# Altium PCB PulseBeeper.PcbDoc
Units mil, origin at the board's own origin, x right, y up, seen from the top; angles counter-clockwise.
Board outline 1968.5 x 1771.65 mil, 2 copper layers (Top Layer, Bottom Layer); 40 components, 37 nets, 157 pads, 34 vias.
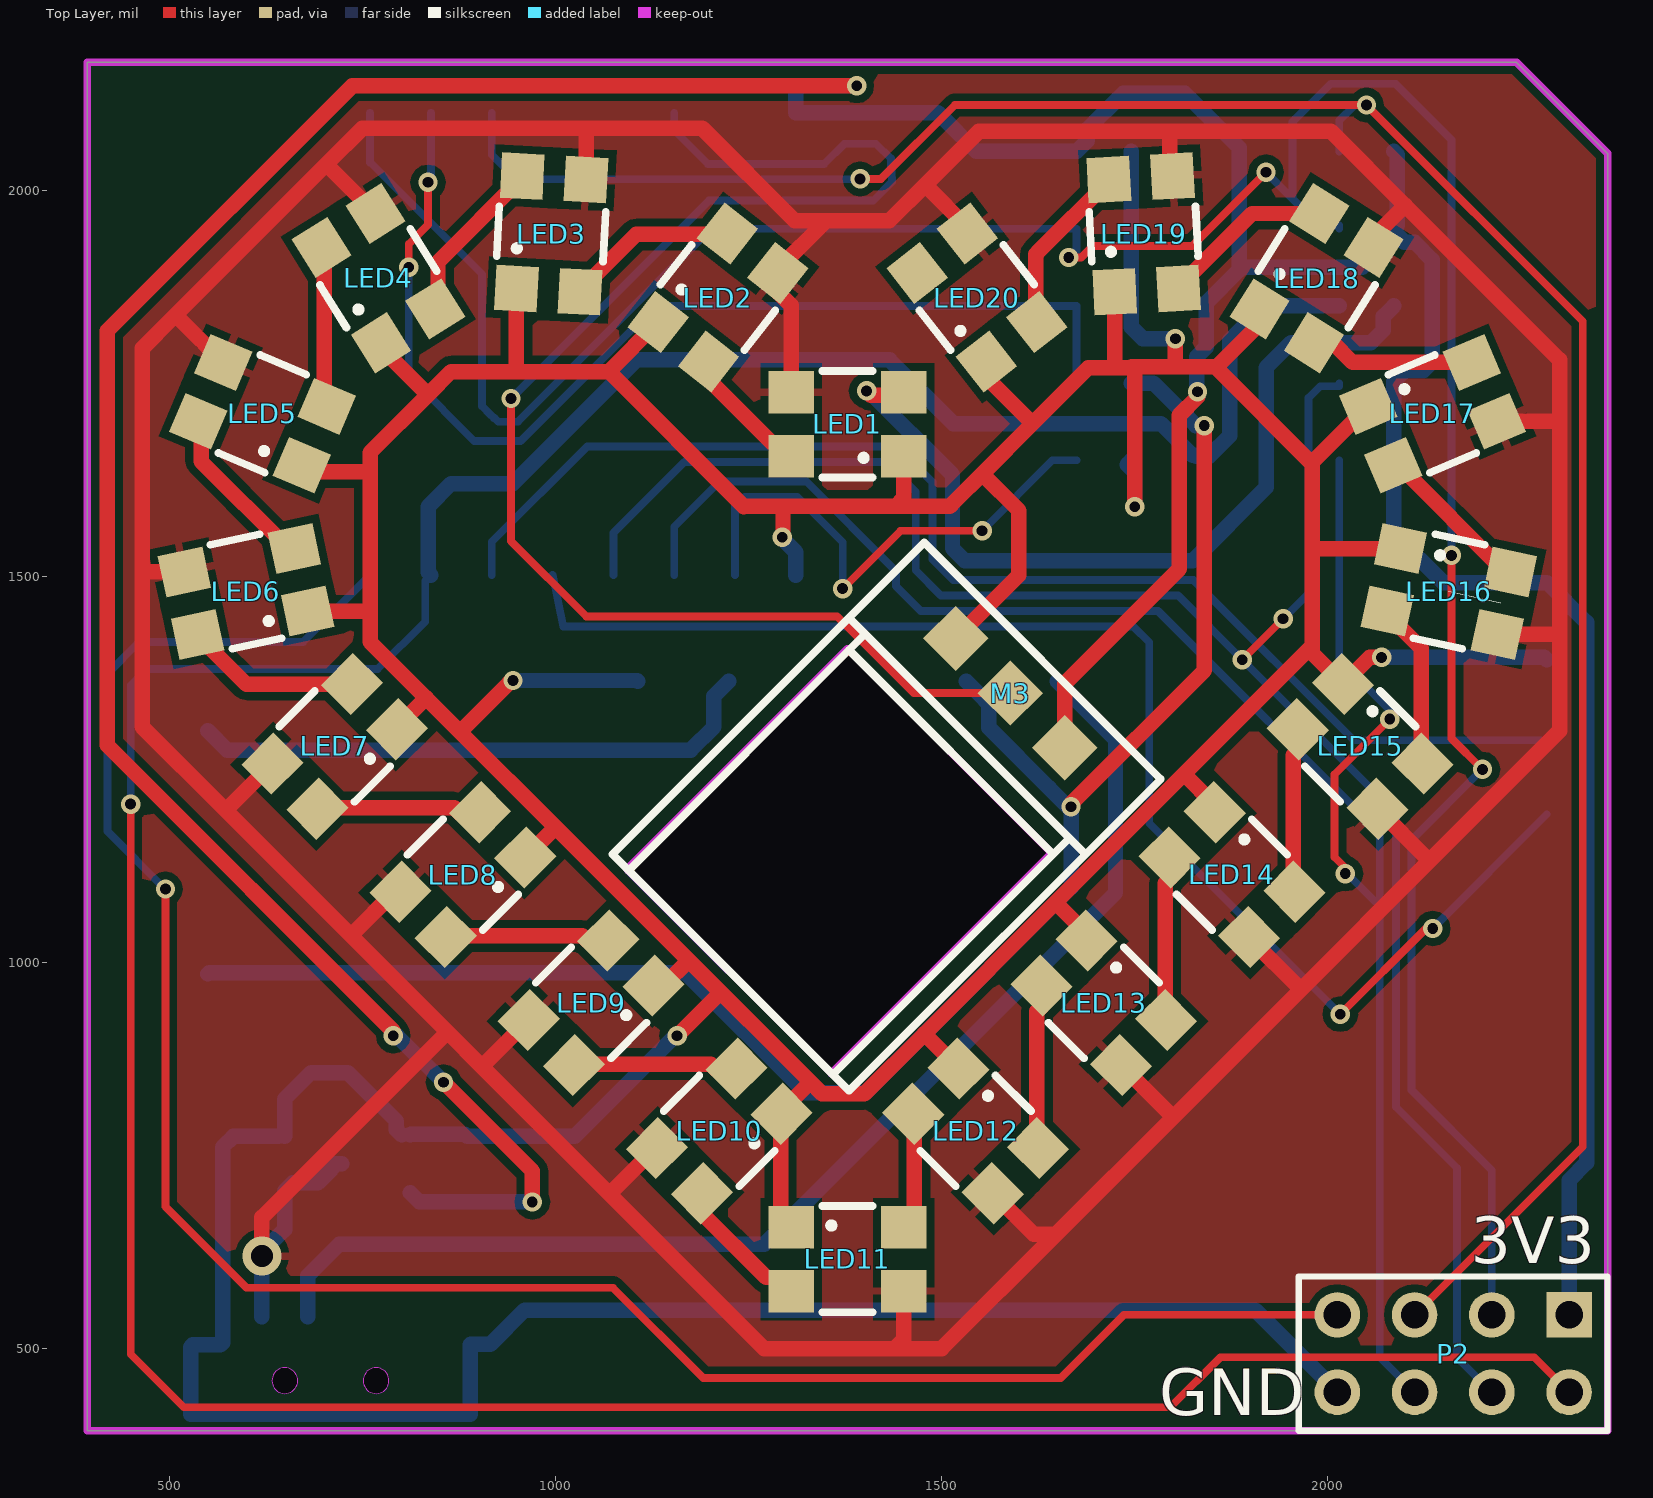
[diagram p0: Top Layer view]
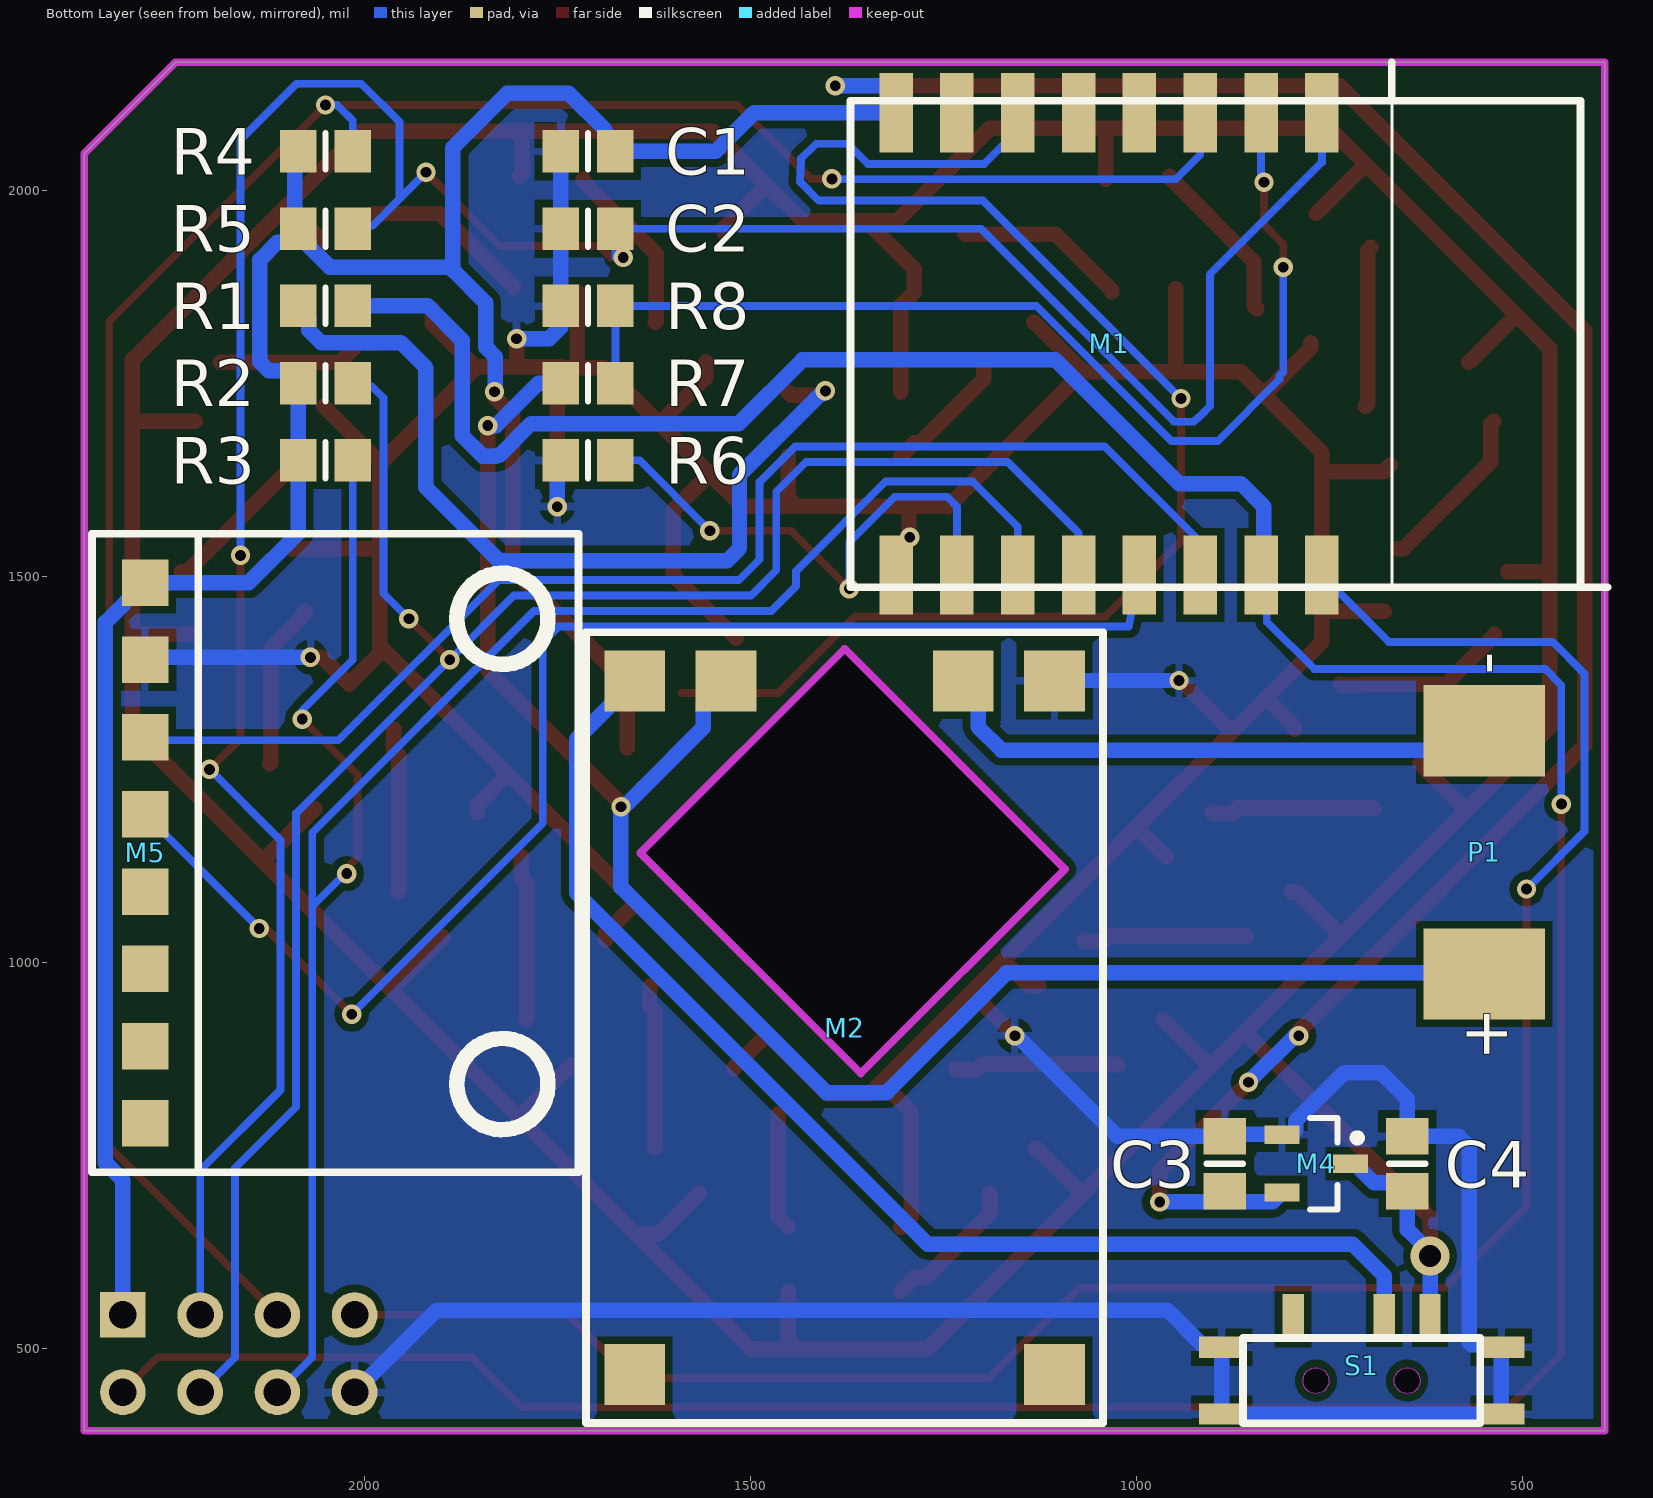
[diagram p1: Bottom Layer view, seen from below]

## Layer stack, top to bottom
Top Solder: solder mask 0.4, Solder Resist, Dk 3.5
Top Layer: signal copper 1.4
Dielectric 1: dielectric 12.6, FR-4, Dk 4.8
Bottom Layer: signal copper 1.4
Bottom Solder: solder mask 0.4, Solder Resist, Dk 3.5

## Board outline
393.7,393.7 2362.2,393.7 2362.2,2047.24 2244.09,2165.35 393.7,2165.35
cut-out: 750.98,458.66 ccw(c767.72,458.66) 767.72,441.93 ccw(c767.72,458.66) 784.45,458.66 ccw(c767.72,458.66) 767.72,475.39 ccw(c767.72,458.66)
cut-out: 632.87,458.66 ccw(c649.61,458.66) 649.61,441.93 ccw(c649.61,458.66) 666.34,458.66 ccw(c649.61,458.66) 649.61,475.39 ccw(c649.61,458.66)
cut-out: 1092.6,1120.85 1357.07,856.38 1642.42,1141.73 1377.95,1406.2

## Design rules (kind name [scope] priority, off if disabled: settings)
Clearance [All] p1: gap=10 ignorepadtopadclearanceinfootprint=FALSE except(0: Arc-Hole Track-Hole SMDPad-Hole THPad-Hole Via-Hole Fill-Hole Poly-Hole Region-Hole Text-Hole)
PolygonConnect [All] p1: connectstyle=Relief reliefconductorwidth=10 reliefentries=4 polygonreliefangle="90 Angle" airgapwidth=10
RoutingVias [All] p1: holewidth=14 width=25 viastyle="Through Hole" minholewidth=14 minwidth=25 maxholewidth=14 maxwidth=25
SolderMaskExpansion [All] p1: expansion=4 istentingtop=FALSE
Width [All] p1: maxlimit=20 minlimit=10 preferedwidth=10 minimp=50.000000 maximp=50.000000 favimp=50.000000
30 further rules are at their usual default settings.

## Components (designator, comment, footprint, x,y, rotation, side; value= is the part's Value field where it differs from the comment)
C1 "Cap" 6-0805_N 1710,2050 r180 bottom value=10uF
C2 "Cap" 6-0805_N 1710,1950 r180 bottom value=470pF
C3 "Cap" 6-0805_N 885.51,739.45 r270 bottom value=1uF
C4 "Cap" 6-0805_N 649.29,739.45 r270 bottom value=1uF
LED1 "WS2812C-2020" "WS2812 3535" 1377.95,1696.85 r0 top locked
LED2 "WS2812C-2020" "WS2812 3535" 1210.32,1860.83 r232 top locked
LED3 "WS2812C-2020" "WS2812 3535" 994.46,1943.11 r267 top locked
LED4 "WS2812C-2020" "WS2812 3535" 770.64,1885.96 r302 top locked
LED5 "WS2812C-2020" "WS2812 3535" 620.65,1710.27 r337 top locked
LED6 "WS2812C-2020" "WS2812 3535" 599.32,1480.25 r12 top locked
LED7 "WS2812C-2020" "WS2812 3535" 714.19,1279.71 r45 top locked
LED8 "WS2812C-2020" "WS2812 3535" 880.13,1113.77 r45 top locked
LED9 "WS2812C-2020" "WS2812 3535" 1046.07,947.83 r45 top locked
LED10 "WS2812C-2020" "WS2812 3535" 1212.01,781.89 r45 top locked
LED11 "WS2812C-2020" "WS2812 3535" 1377.95,615.94 r180 top locked
LED12 "WS2812C-2020" "WS2812 3535" 1543.89,781.89 r135 top locked
LED13 "WS2812C-2020" "WS2812 3535" 1709.84,947.83 r135 top locked
LED14 "WS2812C-2020" "WS2812 3535" 1875.78,1113.77 r135 top locked
LED15 "WS2812C-2020" "WS2812 3535" 2041.72,1279.71 r135 top locked
LED16 "WS2812C-2020" "WS2812 3535" 2156.59,1480.25 r168 top locked
LED17 "WS2812C-2020" "WS2812 3535" 2135.26,1710.27 r203 top locked
LED18 "WS2812C-2020" "WS2812 3535" 1985.27,1885.96 r238 top locked
LED19 "WS2812C-2020" "WS2812 3535" 1761.44,1943.11 r273 top locked
LED20 "WS2812C-2020" "WS2812 3535" 1545.59,1860.83 r308 top locked
M1 "ESP-12E&F Module" "ESP-12E&F Module" 1065.12,1800.79 r270 bottom locked
M2 "TP4056-TypeC" TP4056_17X26 1377.95,915.51 r180 bottom
M3 "TouchPad" TOUCHPAD 1380,1140 r135 top
M4 "XC6206P122MR-G" SOT23_N 767.4,739.45 r180 bottom
M5 "GY-521" GY-521 2037.4,1141.73 r180 bottom locked
P1 "Battery" BatteryPad 550,1142.52 r90 bottom locked
P2 "Header 4X2" HDR2X4 2312.2,543.7 r180 top locked
R1 "Res1" 6-0805_N 2050,1850 r0 bottom value=1K
R2 "Res1" 6-0805_N 2050,1750 r180 bottom value=10K
R3 "Res1" 6-0805_N 2050,1650 r180 bottom value=10K
R4 "Res1" 6-0805_N 2050,2050 r180 bottom value=10K
R5 "Res1" 6-0805_N 2050,1950 r180 bottom value=10K
R6 "Res1" 6-0805_N 1710,1650 r180 bottom value=10K
R7 "Res1" 6-0805_N 1710,1750 r0 bottom value=10K
R8 "Res1" 6-0805_N 1710,1850 r180 bottom value=10K
S1 "MSK12C02" MSK12C02 708.66,403.54 r180 bottom

## Footprints (in the part's own frame and the unit in brackets; to place one, negate y for a bottom-side part, rotate by r counter-clockwise, add the part's x,y. Pads: shape width x height; smd on the part's side, far side on the other; paste and mask are expansions set on the pad)
6-0805_N [mm] "Chip Resistor, Body 2.0x1.2mm, IPC Medium Density"
  rect 1.2x1.4 smd: 1(-0.9,0) 2(0.9,0)
  silkscreen extent 0,-0.6 0,0.6, body extent -1.07,-0.7 1.07,0.7, height 0.7
BatteryPad [mm]
  rect 3x4 smd: 1(-4,0) 2(4,0)
"ESP-12E&F Module" [mm]
  rect 2.6x1.1 smd: 1(-7.6,7.75) 2(-7.6,5.75) 3(-7.6,3.75) 4(-7.6,1.75) 5(-7.6,-0.25) 6(-7.6,-2.25) 7(-7.6,-4.25) 8(-7.6,-6.25) 15(7.6,-6.25) 16(7.6,-4.25) 17(7.6,-2.25) 18(7.6,-0.25) 19(7.6,1.75) 20(7.6,3.75) 21(7.6,5.75) 22(7.6,7.75)
  silkscreen extent -8,-7.75 8,16.25
GY-521 [mil]
  rect 60x60 smd mask+4: 1(-246.06,350) 2(-246.06,250) 3(-246.06,150) 4(-246.06,50) 5(-246.06,-50) 6(-246.06,-150) 7(-246.06,-250) 8(-246.06,-350)
  silkscreen extent -315,-413 315,413
HDR2X4 [mm] "Connector; Header; 4x2 Position"
  rect 1.5x1.5 hole 0.9: 1(0,0)
  round 1.5 hole 0.9: 2(0,2.54) 3(2.54,0) 4(2.54,2.54) 5(5.08,0) 6(5.08,2.54) 7(7.62,0) 8(7.62,2.54)
  silkscreen extent -1.27,-1.27 8.89,3.81
MSK12C02 [mm]
  rect 0.7x1.5 smd: 1(-2.25,3.5) 2(0.75,3.5) 3(2.25,3.5)
  rect 1.5x0.7 smd: 4(-4.6,0.3) 4(-4.6,2.5) 4(4.6,0.3) 4(4.6,2.5)
  silkscreen extent -3.9,0 3.9,2.8
SOT23_N [mm] "SOT23, 3-Leads, Body 2.9x1.3mm, Pitch 0.95mm, Lead Span 2.3mm - Reverse Pinning, IPC Medium Density"
  rect 1.15x0.6 smd: 1(1.125,0) 2(-1.125,-0.95) 3(-1.125,0.95)
  silkscreen extent -0.2,-1.5 1.47,1.5, body extent -0.7,-1.5 0.7,1.5, height 1.1
TOUCHPAD [mil]
  rect 60x60 smd mask+4: 1(100,-295.28) 2(0,-295.28) 3(-100,-295.28)
  silkscreen extent -217,-354 217,217
TP4056_17X26 [mm]
  rect 2x2 smd mask+0.102: 1(-3.9,11.4) 2(3.9,11.4) 3(-6.9,11.4) 4(6.9,11.4) ""(-6.9,-11.4) ""(6.9,-11.4)
  silkscreen extent -8.5,-13 8.5,13
"WS2812 3535" [mm]
  rect 1.5x1.4 smd: 1(-1.85,-1.05) 2(1.85,-1.05) 3(1.85,1.05) 4(-1.85,1.05)
  silkscreen extent -0.83,-1.75 0.83,1.75

## Part data
C1 C2 C3 C4: "Capacitor", LatestRevisionDate=17-Jul-2002, LatestRevisionNote="Re-released for DXP Platform.", PackageDescription="Radial Cap, Thru-Hole; 2 Leads; 0.3 in Pin Spacing", PackageReference=RAD-0.3, Published=8-Jun-2000, Publisher="Altium Limited"
LED1 LED2 LED3 LED4 LED5 LED6 LED7 LED8 LED9 LED10 LED11 LED12 LED13 LED14 LED15 LED16 LED17 LED18 LED19 LED20: "LED", Manufacturer_Name=Worldsemi, Datasheet Link=http://www.world-semi.com/DownLoadFile/139, Height=0.84mm, Manufacturer_Part_Number=WS2812C-2020
M4: "Integrated Circuit", Manufacturer_Name=Torex, Mouser Part Number=865-XC6206P122MR-G, Datasheet Link=https://www.torexsemi.com/file/xc6206/XC6206.pdf, Height=1.3mm, Manufacturer_Part_Number=XC6206P122MR-G, Mouser Price/Stock=https://www.mouser.co.uk/ProductDetail/Torex-Semiconductor/XC6206P122MR-G?qs=AsjdqWjXhJ%2F35%2FU%2FZk2JYg%3D%3D
P1: library part "Header 2", "Header, 2-Pin", LatestRevisionDate=17-Jul-2002, LatestRevisionNote="Re-released for DXP Platform.", Publisher="Altium Limited"
P2: "Header, 4-Pin, Dual row", LatestRevisionDate=17-Jul-2002, LatestRevisionNote="Re-released for DXP Platform.", Publisher="Altium Limited"
R1 R2 R3 R4 R5 R6 R7 R8: "Resistor", LatestRevisionDate=17-Jul-2002, LatestRevisionNote="Re-released for DXP Platform.", PackageDescription="Axial Device, Thru-Hole; 2 Leads; 0.3 in Pin Spacing", PackageReference=AXIAL-0.3, Published=8-Jun-2000, Publisher="Altium Limited"

## Via types
v1: diameter 25, hole 14, Top Layer to Bottom Layer, tented both sides, 33 vias
v2: diameter 50, hole 28, Top Layer to Bottom Layer, tented both sides, 1 vias

## Nets (pads, with @x,y where several pads share a name; then routed paths per layer and width w, separated by ;. In a path a pad name is that pad's centre, name@x,y a point inside that pad or via, vN(x,y) a via of type N, cw(c..) or ccw(c..) an arc to the next point about the centre after c; other vN are vias at no path point)
3V3: C1.2 C3.2 M1.8 M3.3 M4.2 M5.1 P2.1 R2.1 R3.1 R4.1 R5.1 | length 6254.4
  Top Layer w20: v1(790,905) 790,910.96 420,1280.96 420,1818 737,2135 v1(1390,2135) ; v1(855,845) 970,730 v1(970,690) ; M3.3 1659.5,1361.5 1807.5,1509.5 1807.5,1708.46 1831.21,1732.17 v1(1831.21,1738.75)
  Bottom Layer w20: v1(790,905) 795,905 v1(855,845) ; M4.2 823.74,690 v1(970,690) ; v1(1390,2135) 1318.18,2135 1311.18,2128 M1.8 1495,2100 1545,2050 C1.2 1688.19,2063.62 1688.19,2078.19 1735,2125 1815,2125 1885,2055 1885,1896.33 1842.5,1853.83 1842.5,1796.54 1830,1784.04 1830,1739.96 v1(1831.21,1738.75) ; 1885,1900 2044.39,1900 2071.81,1927.42 2071.81,1936.38 2090,1954.57 2090,2045.43 R4.1 ; R5.1@2085.43,1946.07 2099.05,1932.44 2112.13,1932.44 2135,1909.57 2135,1777.47 2123.28,1765.76 2099.06,1765.76 2085.43,1752.14 R3.1 2085.43,1555.6 2149.31,1491.73 M5.1 2335,1440.2 2335,740.8 2312.2,718 P2.1
5V: C4.2 LED1.4 LED2.4 LED3.4 LED4.4 LED5.4 LED6.4 LED7.4 LED8.4 LED9.4 LED10.4 LED11.4 LED12.4 LED13.4 LED14.4 LED15.4 LED16.4 LED17.4 LED18.4 LED19.4 LED20.4 M4.1 S1.3 | length 8054.6
  Top Layer w20: LED6.4 465,1505.54 ; LED5.4 511.53,1835 505,1835 ; v2(620,619.92) 620,670 860,910 ; LED7.4 576.01,1200 570,1200 ; LED4.4 705,2031.73 705,2035 ; LED8.4 791.5,1091.5 735,1035 ; LED9.4 905,865.22 905,865 ; LED3.4 1039.56,2079.56 1040,2080 ; LED10.4 1129.62,759.62 1070,700 ; LED1.4 1305.12,1850.83 1287.74,1868.21 LED2.4 1287.74,1897.74 1350,1960 ; LED11.4 1450.79,511.72 1439.07,500 ; LED20.4 1533.32,1951.68 1480,2005 1480,2008 ; LED12.4 1619.04,648.28 1648.28,648.28 ; LED13.4 1799.2,800 1800,800 ; LED19.4 1795,2021.92 1795,2075 1796.09,2076.09 ; LED14.4 1898.05,1031.95 1965,965 ; LED18.4 2058.92,1938.92 2100,1980 ; LED15.4 2130.47,1132.5 2132.5,1132.5 ; LED17.4 2299.33,1700.67 2300,1700 ; LED16.4 2295.33,1424.67 2300,1420 ; 465,1505.54 465,1795 505,1835 ; 465,1505.54 465,1305 570,1200 ; 505,1835 705,2035 ; 570,1200 735,1035 ; 705,2035 750,2080 1040,2080 ; 735,1035 860,910 ; 860,910 905,865 ; 905,865 1070,700 ; 1040,2080 1190,2080 1310,1960 1350,1960 ; 1070,700 1270,500 1439.07,500 ; 1350,1960 1432,1960 1480,2008 ; 1439.07,500 1500,500 1648.28,648.28 ; 1480,2008 1548.09,2076.09 1796.09,2076.09 ; 1648.28,648.28 1800,800 ; 1796.09,2076.09 2003.91,2076.09 2100,1980 ; 1800,800 1965,965 ; 1965,965 2132.5,1132.5 ; 2100,1980 2300,1780 2300,1700 ; 2132.5,1132.5 2300,1300 2300,1420 ; 2300,1420 2300,1700
  Bottom Layer w20: S1.3 620,541.42 v2(620,619.92) 620,624.84 649.29,654.14 C4.2 659.83,714.55 692.36,714.55 710.47,732.66 710.47,737.64 712.28,739.45 M4.1
ADC: M1.2 R7.1 R8.2 | length 1424.2
  Top Layer w10: v1(810,1900) 810,1930 835,1955 v1(835,2010)
  Bottom Layer w10: v1(810,1900) 810,1764.38 815,1759.38 815,1755 895,1675 954.64,1675 1129.64,1850 R8.2 1674.57,1799 R7.1 ; v1(835,2010) 835,2014.06 838.74,2017.8 M1.2
B+: M2.1 P1.1 R7.2 | length 2317.2
  Top Layer w20: v1(1667.42,1201.53) 1667.42,1205.48 1840,1378.06 v1(1840,1695)
  Bottom Layer w20: P1.1 551.51,986.55 1168.45,986.55 1323.62,831.38 1401.38,831.38 1667.42,1097.42 1667.42,1197.58 1639,1226 1560.87,1304.13 1560.87,1334.96 1549.18,1346.64 M2.1@1540,1355.83 ; v1@1661.21,1203.79 1665.16,1203.79 v1(1667.42,1201.53) ; R7.2 1774,1750 1829,1695 v1(1840,1695) ; M2.1@1540,1355.83 M2.1 M2.1@1540,1355.83
EN: M1.3 P2.5 R4.2 | length 3096.2
  Top Layer w10: v1(1394.41,2014.41) 1421.41,2014.41 1517,2110 v1(2050,2110) 2330,1830 2330,761.5 P2.5
  Bottom Layer w10: M1.3 917.48,2045.52 949.18,2013.82 1393.82,2013.82 v1(1394.41,2014.41) ; R4.2 2014.57,2090 2034.57,2110 v1(2050,2110)
GND: C1.1 C2.1 C3.1 C4.1 LED1.2 LED2.2 LED3.2 LED4.2 LED5.2 LED6.2 LED7.2 LED8.2 LED9.2 LED10.2 LED11.2 LED12.2 LED13.2 LED14.2 LED15.2 LED16.2 LED17.2 LED18.2 LED19.2 LED20.2 M1.15 M2.4 M3.1 M4.3 M5.2 P2.8 R6.1 R8.1 S1.4 | length 9653.5
  Top Layer w20: LED5.2 680.3,1635 760,1635 ; LED6.2 759.96,1454.96 760,1455 ; LED4.2 774.18,1795.82 835,1735 ; LED7.2 794.92,1304.92 832.5,1342.5 ; v1(945,1365) 943.65,1365 941.15,1362.5 940.41,1362.5 876.45,1298.55 ; LED3.2 949.37,1765.63 950,1765 ; LED8.2 999.82,1175 1000,1175 ; LED9.2 1140.1,970.1 1172.5,1002.5 ; LED2.2 1069.01,1765 ; v1(1157.5,905) 1212.5,960 1215,960 ; LED10.2 LED10.2@1292.74,807.74 ; v1(1293.59,1550.45) 1294.55,1551.41 1294.55,1590.33 1295,1590.79 ; LED11.2 1291.35,671.05 1291.35,806.35 LED10.2@1292.74,807.74 ; LED1.2 1450.79,1600.93 1440.25,1590.39 ; 1509.47,1591.32 1510.39,1590.39 ; M3.1 1600,1501.42 1600,1585 1552.5,1632.5 ; LED12.2 1521.62,863.38 1477.5,907.5 ; LED20.2 1557.85,1757.15 1617.5,1697.5 ; LED13.2 1687.57,1037.43 1647.5,1077.5 ; LED19.2 1723.97,1770 ; v1(1750,1590) 1750,1765 1745,1770 ; v1(1802.5,1807.5) 1802.5,1771.25 ; LED14.2 1853.51,1203.99 1813.75,1243.75 ; LED18.2 1911.62,1826.62 1855,1770 ; LED17.2 1980,1647.8 1980,1645 ; v1(2069.5,1395) 2054.01,1395 2019.45,1360.44 1980,1399.89 1980,1410 ; LED16.2 1980.83,1535.83 1980,1535 ; 760,1455 760,1415 832.5,1342.5 ; 760,1455 760,1635 ; 760,1635 760,1660 835,1735 ; 832.5,1342.5 876.45,1298.55 ; 835,1735 865,1765 950,1765 ; 876.45,1298.55 1000,1175 ; 950,1765 1069.01,1765 ; 1000,1175 1172.5,1002.5 ; 1069.01,1765 1244.01,1590 1244.41,1590.39 1244.8,1590.79 1439.86,1590.79 1440.25,1590.39 ; 1172.5,1002.5 1330,845 ; LED10.2@1292.74,807.74 1330,845 ; 1330,845 1345,830 1400,830 1477.5,907.5 ; 1440.25,1590.39 1510.39,1590.39 ; 1477.5,907.5 1647.5,1077.5 ; 1510.39,1590.39 1518.08,1598.08 1552.5,1632.5 ; 1552.5,1632.5 1617.5,1697.5 ; 1617.5,1697.5 1690,1770 1723.97,1770 ; 1647.5,1077.5 1813.75,1243.75 ; 1723.97,1770 1745,1770 ; 1745,1770 1746.25,1771.25 1802.5,1771.25 ; 1802.5,1771.25 1853.75,1771.25 1855,1770 ; 1813.75,1243.75 1974.95,1404.95 1980,1410 ; 1855,1770 1980,1645 ; 1980,1410 1980,1535 ; 1980,1535 1980,1645
  Bottom Layer w20: C4.1@640.88,774.88 583,774.88 569,760.88 569,507.83 566.23,505.06 530.65,505.06 527.56,501.97 527.56,415.35 889.76,415.35 S1.4@889.76,501.97 ; C4.1 649.29,823.18 683.61,857.5 731.04,857.5 794.05,794.49 794.05,783.66 M4.3@800.87,776.85 ; M4.3 812.6,777.76 882.64,777.76 C3.1 1024.88,774.88 1155,905 v1(1157.5,905) ; S1.4@889.76,505 890.51,505.75 915.75,505.75 960,550 1905.9,550 P2.8 ; v1(945,1365) 1105.63,1365 M2.4 ; v1(1293.59,1550.45) 1293.59,1548.69 1311.18,1531.1 M1.15 ; R6.1 1740,1644.57 1750,1634.57 v1(1750,1590) ; C1.1 C2.1 R8.1 1745.43,1822.43 1760.36,1807.5 v1(1802.5,1807.5) ; v1(2069.5,1395) 2280.2,1395 M5.2
IO0: M1.18 P2.4 R2.2 | length 2578.8
  Top Layer w10: v1(1889,1392) v1(1942,1445)
  Bottom Layer w10: M1.18 1074.96,1556 1166.96,1648 1427.8,1648 1466.25,1609.55 1466.25,1507.75 1499,1475 1806,1475 v1(1889,1392) 2088,1193.04 2088,813 2167,734 2167,488.9 P2.4 ; v1(1942,1445) 1975,1478 1975,1731 1990,1746 2014.57,1746 R2.2
IO2: M1.17 P2.6 R3.2 | length 2602.1
  Top Layer w10: v1(2022.5,1115) 2022.5,1122.5 2008.63,1136.37 2008.63,1243.63 v1(2080,1315)
  Bottom Layer w10: M1.17 1153.7,1564.01 1212.44,1622.75 1324.54,1622.75 1440.77,1506.53 1440.77,1487.23 1473,1455 1780,1455 2067,1168 2067,1073 ; R3.2 2014.57,1391.97 2080,1326.54 v1(2080,1315) ; v1(2022.5,1115) 2025,1115 2067,1073 ; P2.6 2067,488.9 2067,1073
IO4: M1.19 M5.4 | length 1793.6
  Top Layer w10: v1(2016,933) 2126.94,1043.94 v1(2135.67,1043.94)
  Bottom Layer w10: M1.19 1010,1435 1748,1435 1768.57,1414.43 1768.57,1180.43 v1(2016,933) ; v1(2135.67,1043.94) M5.4
IO5: M1.20 M5.3 | length 1678
  Bottom Layer w10: M1.20 917.48,1544.48 1041,1668 1442,1668 1488,1622 1488,1522 1515,1495 1826.04,1495 2033.54,1287.5 2279.23,1287.5 M5.3
IO12: M1.6 M3.2 | length 1891.9
  Top Layer w10: v1(942.47,1730) 942.47,1545.53 1040,1448 1364.44,1448 1463.65,1348.79 M3.2
  Bottom Layer w10: v1(942.47,1730) 1198.79,1986.32 1411.32,1986.32 1435.65,2010.65 1434.45,2037.14 1434.27,2041.14 1414.54,2060 1374.18,2060 1348,2033.82 1197.18,2033.82 1153.7,2077.3 M1.6
IO15: M1.16 R6.2 | length 688.9
  Top Layer w10: v1(1371.75,1484) 1446.75,1559 v1(1552.3,1559)
  Bottom Layer w10: M1.16 1232.44,1590 1245.2,1602.75 1313,1602.75 1371.75,1544 v1(1371.75,1484) ; v1(1552.3,1559) 1643.3,1650 R6.2
NetLED1_1: LED1.1 LED2.3 | length 191.5
  Top Layer w20: LED2.3@1198.05,1759.88 LED2.3 1198.05,1754.7 1279.68,1673.07 1287.56,1673.07 LED1.1 LED1.1@1303.15,1655.51
NetLED1_3: LED1.3 R1.2 | length 1119.3
  Top Layer w20: v1(1402.77,1740) 1408.31,1734.46 1447.05,1734.46 LED1.3
  Bottom Layer w20: v1(1402.77,1740) 1405.36,1740 1514,1631.36 1514,1536 1530,1520 1825,1520 1920,1615 1920,1770 1952.44,1802.44 2055.53,1802.44 2071.81,1818.72 2071.81,1836.38 R1.2
NetLED2_1: LED2.1 LED3.3 | length 223
  Top Layer w20: LED3.3 1031.93,1870.07 1104.33,1942.47 1221.37,1942.47 LED2.1
NetLED3_1: LED3.1 LED4.3 | length 218.6
  Top Layer w20: LED4.3 847.87,1849.68 847.87,1907.03 956.99,2016.15 LED3.1
NetLED4_1: LED4.1 LED5.3 | length 208.8
  Top Layer w20: LED4.1 700.55,1922.25 700.55,1723.15 LED5.3
NetLED5_1: LED5.1 LED6.3 | length 221
  Top Layer w20: LED5.1 541.26,1696.86 541.26,1648.74 654.17,1535.83 LED6.3
NetLED6_1: LED6.1 LED7.3 | length 228.3
  Top Layer w20: LED6.1 536.67,1423.33 600,1360 709.28,1360 710.23,1359.05 735.06,1359.05 LED7.3
NetLED7_1: LED7.1 LED8.3 | length 214.6
  Top Layer w20: LED7.1 693.31,1200.37 868.91,1200.37 876.17,1193.11 901.01,1193.11 LED8.3
NetLED8_1: LED8.1 LED9.3 | length 214.6
  Top Layer w20: LED8.1 859.25,1034.43 1034.85,1034.43 1042.12,1027.17 1066.95,1027.17 LED9.3
NetLED9_1: LED9.1 LED10.3 | length 214.6
  Top Layer w20: LED9.1 1025.19,868.49 1200.8,868.49 1208.06,861.23 1232.89,861.23 LED10.3
NetLED10_1: LED10.1 LED11.3 | length 183.4
  Top Layer w20: LED10.1 1189.21,700.62 1189.21,675.79 1272.84,592.17 1287.56,592.17 LED11.3
NetLED11_1: LED11.1 LED12.3 | length 153.2
  Top Layer w20: LED11.1 1464.55,671.05 1464.55,802.77 LED12.3
NetLED12_1: LED12.1 LED13.3 | length 214.6
  Top Layer w20: LED12.1 1623.24,761.01 1623.24,936.62 1630.5,943.88 1630.5,968.71 LED13.3
NetLED13_1: LED13.1 LED14.3 | length 214.6
  Top Layer w20: LED13.1 1789.18,926.95 1789.18,1102.56 1796.44,1109.82 1796.44,1134.65 LED14.3
NetLED14_1: LED14.1 LED15.3 | length 214.6
  Top Layer w20: LED14.1 1955.12,1092.89 1955.12,1268.5 1962.38,1275.76 1962.38,1300.59 LED15.3
NetLED15_1: LED15.1 LED16.3 | length 216.4
  Top Layer w20: LED16.3 2076.75,1450.87 2121.06,1406.56 2121.06,1258.83 LED15.1
NetLED16_1: LED16.1 LED17.3 | length 209.3
  Top Layer w20: LED17.3 2091.09,1643.76 2229.31,1505.54 LED16.1
NetLED17_1: LED17.1 LED18.3 | length 215
  Top Layer w20: LED18.3 2006.54,1802.29 2032.05,1776.78 LED17.1
NetLED18_1: LED18.1 LED19.3 | length 223.6
  Top Layer w20: LED19.3 1806.54,1874.4 1901.77,1969.63 LED18.1
NetLED19_1: LED19.1 LED20.3 | length 224.5
  Top Layer w20: LED20.3 1621.79,1830.1 1621.79,1916.79 1625,1920 1625,1920.47 1716.35,2011.82 LED19.1
NetM2_2: M2.2 P1.2 | length 745.2
  Bottom Layer w20: P1.2 575,1275 1175,1275 1205,1305 1205,1344.92 M2.2
NetM2_3: M2.3 S1.2 | length 1609.6
  Bottom Layer w20: S1.2 679.13,594.13 720,635 1270,635 1725,1090 1725,1288.94 1678.98,1334.96 M2.3
RST: C2.2 M1.1 P2.3 R5.2 | length 3772
  Top Layer w10: v1(1664.48,1912.6) 1680.6,1912.6 1695.54,1927.54 1824.32,1927.54 v1(1919.89,2023.11) ; v1(2160,1527) 2160,1290 v1(2200,1250)
  Bottom Layer w10: M1.1 760,2035.75 905,1890.75 905,1720 915,1710 920,1705 920.94,1705 925.94,1700 951.36,1700 1201.36,1950 C2.2 1674.57,1912.6 v1(1664.48,1912.6) ; v1(1919.89,2023.11) 1954,1989 ; R5.2 2014.57,1954 1989,1954 1954,1989 ; v1(2160,1527) 2160,2065 2087.5,2137.5 2003.5,2137.5 1954,2088 1954,1989 ; v1(2200,1250) 2108.17,1158.17 2108.17,834.83 2212.2,730.8 P2.3
RX: M1.21 P2.2 R1.1 | length 4834.1
  Top Layer w10: v1(450,1205) 450,493 519,424 1796,424 1861,489 2266.9,489 P2.2
  Bottom Layer w10: v1(450,1205) 450,1359.01 470.99,1380 770,1380 831.25,1441.25 831.25,1494.08 M1.21
  Bottom Layer w20: M1.21 835,1505.31 835,1590 865,1620 945,1620 1105,1780 1432.51,1780 1514.95,1697.56 1783.73,1697.56 1824.81,1656.48 1828.52,1656.48 1829.7,1655.3 1846.27,1655.3 1873,1682.04 1873,1805.5 1917.5,1850 R1.1
TX: M1.22 P2.7 | length 2757.1
  Top Layer w10: v1(495,1095) 495,684 600,579 1074.35,579 1191.35,462 1654,462 1736,544 2012.2,544 P2.7
  Bottom Layer w10: v1(495,1095) 420,1170 420,1373.64 461.36,1415 673.43,1415 M1.22
pads on no net: LED20.1 M1.4 M1.5 M1.7 M2. M5.5 M5.6 M5.7 M5.8 S1.1

## Polygon pours and split planes (outlines as drawn)
GND on Bottom Layer "GND_L02_P003" (solid, remove dead copper, pour order 3): 669.8,2165 2239.37,2165 2357.13,2047.24 2362.2,2047.24 2362.2,393.7 393.7,393.7 393.7,1485.83 668.57,1485.83 668.57,2164.47
5V on Top Layer "5V_L01_P002" (solid, remove dead copper, pour order 2): 2244.09,2165.35 393.7,2165.35 393.7,393.7 2362.2,393.7 2362.2,2047.24

## Keep-outs
Keep-Out Layer:
  lines w10: 393.7,393.7 2362.2,393.7 2362.2,2047.24 2244.09,2165.35 393.7,2165.35 393.7,393.7 ; 1092.6,1120.85 1357.07,856.38 1642.42,1141.73 1377.95,1406.2 1092.6,1120.85

## Silkscreen, mask and mechanical layers (free items; w line width, h text height)
Top Overlay:
  lines w0.5: 2156.59,1480.25 2223.91,1465.58
  text "3V3" at 2185.2,610.39 h60
  text "GND" at 1781.65,413.54 h60
Bottom Overlay:
  lines w10: 390,1485.83 425.36,1485.83 ; 669.45,2115.75 669.45,2165.35
Mechanical 1:
  circle w10: c649.61,458.66 r16.73
  circle w10: c767.72,458.66 r16.73
  lines w10: 393.7,393.7 2362.2,393.7 2362.2,2047.24 2244.09,2165.35 393.7,2165.35 393.7,393.7 ; 1092.6,1120.85 1357.07,856.38 1642.42,1141.73 1377.95,1406.2 1092.6,1120.85

## Text inside footprints (layer, text, board x,y; h text height)
P1: Bottom Overlay "+" at 520,872.52 h60 r270; Bottom Overlay "-" at 520.01,1372.52 h60 r270